# Allegro board SATROT-2-POWERBOARD-3.brd
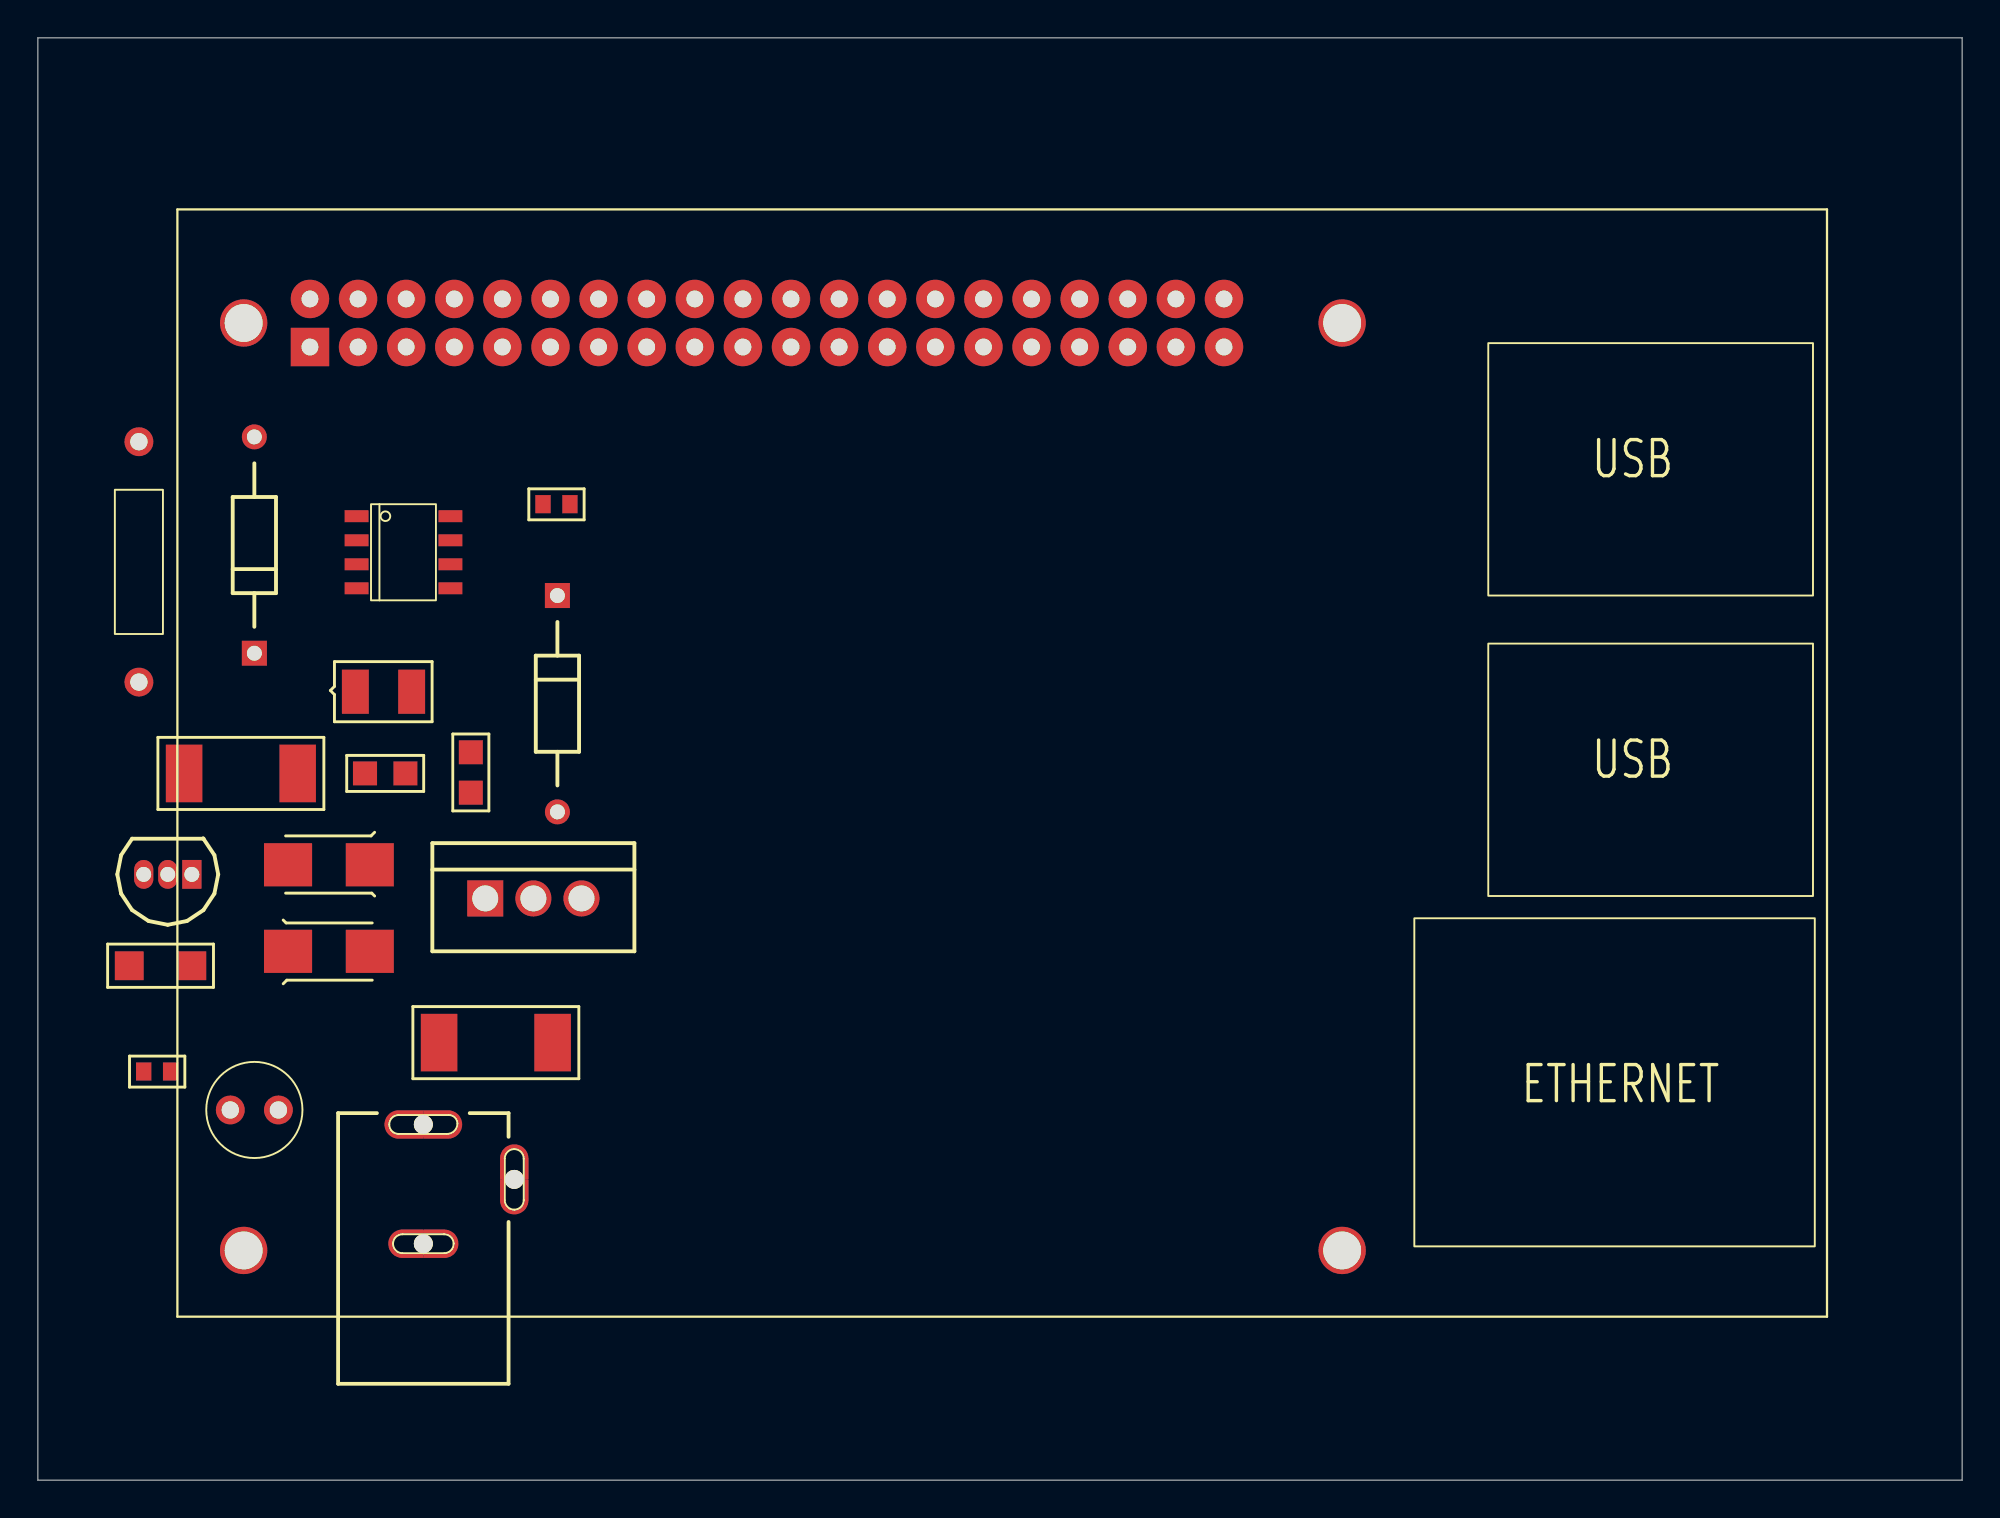
[diagram p0: board, top side]
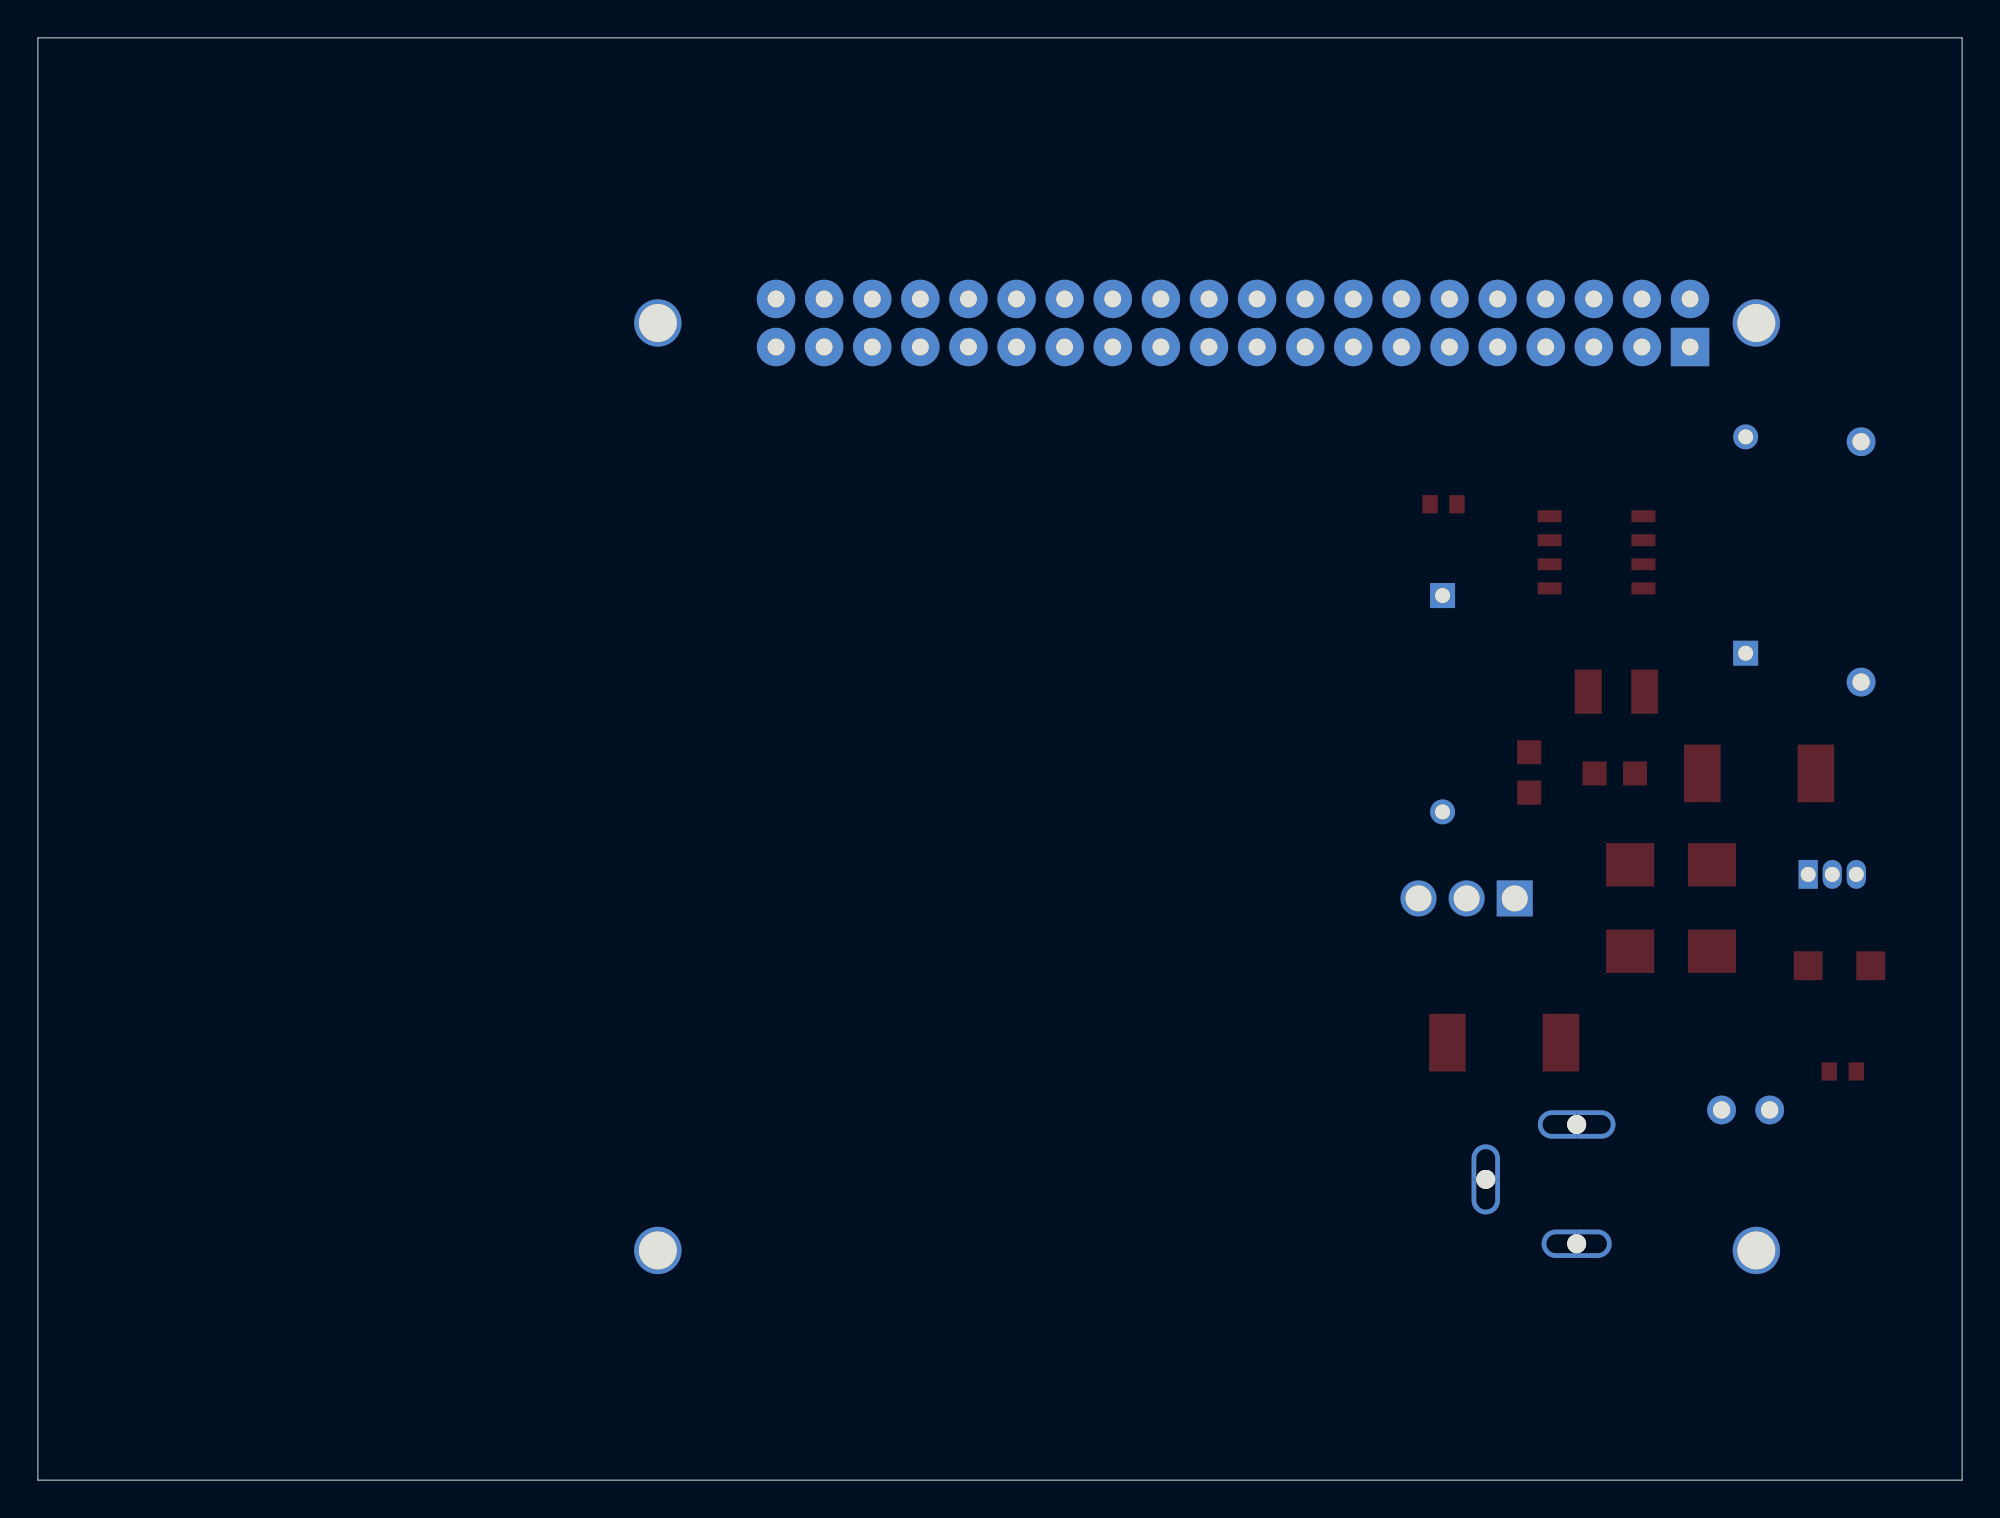
[diagram p1: board, bottom side, seen from below]

Outline 101.6 x 76.2 mm; copper layers: TOP, BOTTOM. Coordinates in mm from the lower left corner of the outline.
Outline path: 0,76.2 101.6,76.2 101.6,0 0,0 0,76.2

## Design rules (mm)
constraint set DEFAULT: min track width 0.305

## Placement (name value [footprint] x y rotation side)
C14  1000uF, 25V  [CAP196]  10.16 19.56 270 top
C15  0.1 uF  [SMC0603]  5.59 21.59 0 top
C16  0.1 uF  [SMC0603]  26.67 51.56 0 top
D1  1N4007  [SMDO214AC12]  17.53 32.51 180 top
D2  1N4007  [SMDO214AC12]  13.21 27.94 0 top
D3  LED red  [SMD120612]  16.76 41.66 0 top
D4  1N4148  [DAX1DO204AH]  11.43 43.69 90 top
D5  1N4148  [DAX1DO204AH]  27.43 46.74 270 top
J16  DCJ200-10-A-XX-X_REVA  [GCT_DCJ200-10-A-XX-X_REVA]  22.35 15.24 0 top
Q1  BC327  [TO92]  8.13 32 180 top
Q3  MJE2955  [TO220AB]  23.62 30.73 0 top
R26  10K  [SMR1206]  4.83 27.18 0 top
R27  1M  [RES500]  5.33 54.86 0 top
R28  470  [SMR0805]  17.27 37.34 0 top
R29  150, 2W  [SMR2512]  13.72 37.34 180 top
R30  100K  [SMR0805]  22.86 36.32 90 top
R34  1, 2W  [SMR2512]  27.18 23.11 180 top
U4  TL072  [SOIC8]  19.3 49.02 0 top
U9  Raspberry Pi B+  [GU-RASP-PI-3]  7.37 8.64 0 top

## Library data of the parts
C14 = CAP POL: Tolerance: ***; User Part Number: ***
C15 C16 = CAP NP
D1 D2 D4 D5 = DIODE
D3 = LED
J16 = DCJ200-10-A-XX-X_REVA
Q1 Q3 = BC327
R26 R28-R30 R34 = R
R27 = R: Tolerance: ***; User Part Number: ***
U4 = TL072: Tolerance: ***; User Part Number: ***
U9 = Raspberry Pi B+

## Footprints (pads in the part's own frame, mm; a bottom-side part is the same pattern mirrored in y, then rotated)
CAP196
  round 1.524 hole 0.914: 1(0,0) 2(0,2.54)
DAX1DO204AH
  rect 1.321x1.321 hole 0.787: 1(0,0)
  round 1.321 hole 0.787: 2(11.43,0)
GCT_DCJ200-10-A-XX-X_REVA
  round 1 hole 1 unplated: (-2,3.55) (-2,-2.75) (2.8,0.65)
  rect 0.1x0.1 smd: 1(-2,2.95) 2(-2,-2.1) 3(2.2,0.65)
GU-RASP-PI-3
  round 2.5 hole 2 unplated: (3.5,52.5) (3.5,3.5) (61.5,52.5) (61.5,3.5)
  rect 2.032x2.032 hole 0.889: 1(7,51.23)
  round 2.032 hole 0.889: 2(7,53.77) 3(9.54,51.23) 4(9.54,53.77) 5(12.08,51.23) 6(12.08,53.77) 7(14.62,51.23) 8(14.62,53.77) 9(17.16,51.23) 10(17.16,53.77) 11(19.7,51.23) 12(19.7,53.77) 13(22.24,51.23) 14(22.24,53.77) 15(24.78,51.23) 16(24.78,53.77) 17(27.32,51.23) 18(27.32,53.77) 19(29.86,51.23) 20(29.86,53.77) 21(32.4,51.23) 22(32.4,53.77) 23(34.94,51.23) 24(34.94,53.77) 25(37.48,51.23) 26(37.48,53.77) 27(40.02,51.23) 28(40.02,53.77) 29(42.56,51.23) 30(42.56,53.77) 31(45.1,51.23) 32(45.1,53.77) 33(47.64,51.23) 34(47.64,53.77) 35(50.18,51.23) 36(50.18,53.77) 37(52.72,51.23) 38(52.72,53.77) 39(55.26,51.23) 40(55.26,53.77)
RES500
  round 1.524 hole 0.914: 1(0,-12.7) 2(0,0)
SMC0603
  rect 0.813x0.965 smd: 1(0,0) 2(1.422,0)
SMD120612
  rect 1.422x2.337 smd: 1(0,0) 2(2.972,0)
SMDO214AC12
  rect 2.54x2.286 smd: 1(0,0) 2(4.318,0)
SMR0805
  rect 1.27x1.27 smd: 1(0,0) 2(2.134,0)
SMR1206
  rect 1.524x1.524 smd: 1(0,0) 2(3.302,0)
SMR2512
  rect 1.93x3.048 smd: 1(0,0) 2(5.994,0)
SOIC8
  rect 1.27x0.635 smd: 1(-2.477,1.905) 2(-2.477,0.635) 3(-2.477,-0.635) 4(-2.477,-1.905) 5(2.477,-1.905) 6(2.477,-0.635) 7(2.477,0.635) 8(2.477,1.905)
TO92
  rect 1.016x1.524 hole 0.787: 1(0,0)
  oval 1.016x1.524 hole 0.787: 2(1.27,0) 3(2.54,0)
TO220AB
  rect 1.905x1.905 hole 1.372: 1(0,0)
  round 1.905 hole 1.372: 2(2.54,0) 3(5.08,0)

## Nets
GND1: U9.6
GND3: U9.14
GND4: U9.20
GND5: U9.25
GND6: U9.30
GND7: U9.34
GND8: U9.39
GND_POWER: C14.2 C15.2 C16.1 C16.2 D4.1(K) J16.2 J16.3 Q1.1 U4.3 U4.4
P3V3: U9.1 U9.17
P5V: U9.2 U9.4(P5V#4)
N12978: C14.1 C15.1 D2.2 J16.1 R26.1 R34.2 U4.8
N13089: D1.2 D2.1(K)
N13093: D1.1(K) Q3.2 R28.1 R29.1
N13141: D3.1(CATHODE) Q1.3(EMITTER) R29.2
N13166: Q1.2 R26.2 R27.1 U4.1
N13277: D5.1(K) R30.2
N13315: D5.2 Q3.1 R30.1
N13493: U4.2
N360181: D4.2 R27.2
N362820: D3.2 R28.2
N366460: Q3.3(EMITTER) R34.1

Pads without a net: U4 5 6 7; U9 3 5 7 8 9 10 11 12 13 15 16 18 19 21 22 23 24 26 27 28 29 31 32 33 35 36 37 38 40

## Copper pours and planes (outline as drawn; the poured copper is in the pictures)
GND_POWER on TOP (solid shape): 20.35,12.99 19.25,12.99 18.9,12.84 18.75,12.49 18.9,12.14 19.25,11.99 20.35,11.99 20.35,11.74 19.25,11.74 18.72,11.96 18.5,12.49 18.72,13.02 19.25,13.24 20.35,13.24
GND_POWER on TOP (solid shape): 21.45,13.24 21.98,13.02 22.2,12.49 21.98,11.96 21.45,11.74 20.35,11.74 20.35,11.99 21.45,11.99 21.81,12.14 21.95,12.49 21.81,12.84 21.45,12.99 20.35,12.99 20.35,13.24
GND_POWER on TOP (solid shape): 24.65,14.79 24.8,14.44 25.15,14.29 25.51,14.44 25.65,14.79 25.65,15.89 25.9,15.89 25.9,14.79 25.68,14.26 25.15,14.04 24.62,14.26 24.4,14.79 24.4,15.89 24.65,15.89
GND_POWER on TOP (solid shape): 25.68,17.52 25.9,16.99 25.9,15.89 25.65,15.89 25.65,16.99 25.51,17.34 25.15,17.49 24.8,17.34 24.65,16.99 24.65,15.89 24.4,15.89 24.4,16.99 24.62,17.52 25.15,17.74
Net_1 on BOTTOM (solid shape): 20.35,12.99 19.25,12.99 18.9,12.84 18.75,12.49 18.9,12.14 19.25,11.99 20.35,11.99 20.35,11.74 19.25,11.74 18.72,11.96 18.5,12.49 18.72,13.02 19.25,13.24 20.35,13.24
Net_1 on BOTTOM (solid shape): 21.45,13.24 21.98,13.02 22.2,12.49 21.98,11.96 21.45,11.74 20.35,11.74 20.35,11.99 21.45,11.99 21.81,12.14 21.95,12.49 21.81,12.84 21.45,12.99 20.35,12.99 20.35,13.24
Net_2 on BOTTOM (solid shape): 24.65,14.79 24.8,14.44 25.15,14.29 25.51,14.44 25.65,14.79 25.65,15.89 25.9,15.89 25.9,14.79 25.68,14.26 25.15,14.04 24.62,14.26 24.4,14.79 24.4,15.89 24.65,15.89
Net_2 on BOTTOM (solid shape): 25.68,17.52 25.9,16.99 25.9,15.89 25.65,15.89 25.65,16.99 25.51,17.34 25.15,17.49 24.8,17.34 24.65,16.99 24.65,15.89 24.4,15.89 24.4,16.99 24.62,17.52 25.15,17.74
Net_3 on BOTTOM (solid shape): 20.35,19.29 19.05,19.29 18.7,19.14 18.55,18.79 18.7,18.44 19.05,18.29 20.35,18.29 20.35,18.04 19.05,18.04 18.52,18.26 18.3,18.79 18.52,19.32 19.05,19.54 20.35,19.54
Net_3 on BOTTOM (solid shape): 21.65,19.54 22.18,19.32 22.4,18.79 22.18,18.26 21.65,18.04 20.35,18.04 20.35,18.29 21.65,18.29 22.01,18.44 22.15,18.79 22.01,19.14 21.65,19.29 20.35,19.29 20.35,19.54
N12978 on TOP (solid shape): 20.35,19.29 19.05,19.29 18.7,19.14 18.55,18.79 18.7,18.44 19.05,18.29 20.35,18.29 20.35,18.04 19.05,18.04 18.52,18.26 18.3,18.79 18.52,19.32 19.05,19.54 20.35,19.54
N12978 on TOP (solid shape): 21.65,19.54 22.18,19.32 22.4,18.79 22.18,18.26 21.65,18.04 20.35,18.04 20.35,18.29 21.65,18.29 22.01,18.44 22.15,18.79 22.01,19.14 21.65,19.29 20.35,19.29 20.35,19.54
